# EAGLE board Cronómetro (EAGLE 7.6.0)

Size 73.58 x 63.39 mm. Coordinates in mm from the lower left corner, seen from the top.
Outline: 0,0 56.82,0 56.82,53.33 0,53.33 0,0
Copper layers (1*16): Top 0.035mm / dielectric 1.5mm / Bottom 0.035mm
Design rules "default": minimum track width 10mil, minimum drill 24mil, track to track 8mil, track to pad 8mil, pad to pad 8mil, via to via 8mil, smd to smd 8mil, copper to edge 40mil, drill to drill 8mil, minimum pad ring 10mil, minimum via ring 8mil, stop-mask expansion 4mil, vias tented up to drill 0mil, thermal gap 10mil

## Footprints (pad centres in the part's own frame; a part is rotated, then mirrored left to right if it is on the bottom)
LED5MM = drill 0.813 octagon: A -1.27,0; K 1.27,0
HDSP-M = drill 0.813 long: 1 -5.08,-7.62; 2 -2.54,-7.62; 3 0,-7.62; 4 2.54,-7.62; 5 5.08,-7.62; 6 5.08,7.62; 7 2.54,7.62; 8 0,7.62; 9 -2.54,7.62; 10 -5.08,7.62
0207/10 = drill 0.813 octagon: 1 -5.08,0; 2 5.08,0
TO92 = drill 0.813 octagon: 1 1.27,0; 2 0,1.905; 3 -1.27,0
ARDUINO_UNO = drill 1.016 pad 1.88: 0 63.5,50.8; 1 60.96,50.8; 2 58.42,50.8; 3 55.88,50.8; 3.3V 35.56,2.54; 4 53.34,50.8; 5 50.8,50.8; 5V 38.1,2.54; 6 48.26,50.8; 7 45.72,50.8; 8 41.656,50.8; 9 39.116,50.8; 10 36.576,50.8; 11 34.036,50.8; 12 31.496,50.8; 13 28.956,50.8; A0 50.8,2.54; A1 53.34,2.54; A2 55.88,2.54; A3 58.42,2.54; A4 60.96,2.54; A5 63.5,2.54; AREF 23.876,50.8; GND 26.416,50.8; GND. 43.18,2.54; GND.. 40.64,2.54; I/OREF 30.48,2.54; N/C 27.94,2.54; RESET 33.02,2.54; SCL 18.796,50.8; SDA 21.336,50.8; VIN 45.72,2.54 | hole 3.2: 66.04,7.62; 66.04,35.56; 15.24,50.8; 13.97,2.54

## Placement (x,y rotation side)
D1  [LED5MM]  5,213.28 0 top  (outside the outline)
D2  [LED5MM]  5,225.98 0 top  (outside the outline)
Digit1  [HDSP-M]  5,111.68 0 top  (outside the outline)
Digit2  [HDSP-M]  5,124.38 0 top  (outside the outline)
Digit3  [HDSP-M]  5,137.08 0 top  (outside the outline)
Digit4  [HDSP-M]  5,149.78 0 top  (outside the outline)
R4  220‎Ω  [0207/10]  5,22.78 0 top
R5  220‎Ω  [0207/10]  5,35.48 0 top
R6  220‎Ω  [0207/10]  5,48.18 0 top
R7  220‎Ω  [0207/10]  5,60.88 0 top
R8  220‎Ω  [0207/10]  5,73.58 0 top  (outside the outline)
R9  220‎Ω  [0207/10]  5,86.28 0 top  (outside the outline)
R10  220‎Ω  [0207/10]  5,98.98 0 top  (outside the outline)
T2  [TO92]  5,162.48 0 top  (outside the outline)
T3  [TO92]  5,175.18 0 top  (outside the outline)
T4  [TO92]  5,187.88 0 top  (outside the outline)
T5  [TO92]  5,200.58 0 top  (outside the outline)
U1  [ARDUINO_UNO]  5,10.08 0 top

## Library data of the parts
D1 D2 Digit1-Digit4 R4-R10 T2-T5 U1 = AUTODESK_CIRCUITS_BREADBOARD

## Nets
N$1: R4.1 U1.2
N$2: R5.1 U1.3
N$3: R6.1 U1.4
N$4: R7.1 U1.5
N$5: R8.1 U1.6
N$6: R9.1 U1.7
N$7: R10.1 U1.8
N$8: Digit1.10 Digit2.10 Digit3.10 Digit4.10 R10.2
N$9: Digit1.9 Digit2.9 Digit3.9 Digit4.9 R9.2
N$10: Digit1.7 Digit2.7 Digit3.7 Digit4.7 R4.2
N$11: Digit1.6 Digit2.6 Digit3.6 Digit4.6 R5.2
N$12: Digit1.1 Digit2.1 Digit3.1 Digit4.1 R8.2
N$13: Digit1.2 Digit2.2 Digit3.2 Digit4.2 R7.2
N$14: Digit1.4 Digit2.4 Digit3.4 Digit4.4 R6.2
N$15: Digit1.3 T2.1
N$16: Digit2.3 T3.1
N$17: Digit3.3 T4.1
N$18: Digit4.3 T5.1
N$19: T2.2 U1.9
N$20: T3.2 U1.10
N$21: T4.2 U1.11
N$22: T5.2 U1.12
N$23: D1.K D2.K T2.3 T3.3 T4.3 T5.3 U1.GND.
N$24: D1.A D2.A U1.13

## Tracks (layer width: path | path; a pad name or v marks a point on that pad's centre or on a via)
N$1  (1 unrouted)
N$2  (1 unrouted)
N$3  (1 unrouted)
N$4  (1 unrouted)
N$5  (1 unrouted)
N$6  (1 unrouted)
N$7  (1 unrouted)
N$8  (4 unrouted)
N$9  (4 unrouted)
N$10  (4 unrouted)
N$11  (4 unrouted)
N$12  (4 unrouted)
N$13  (4 unrouted)
N$14  (4 unrouted)
N$15  (1 unrouted)
N$16  (1 unrouted)
N$17  (1 unrouted)
N$18  (1 unrouted)
N$19  (1 unrouted)
N$20  (1 unrouted)
N$21  (1 unrouted)
N$22  (1 unrouted)
N$23  (6 unrouted)
N$24  (2 unrouted)